# Altium PCB LAN7800_USB_Ethernet_RevA.PcbDoc
Units mil, origin at the board's own origin, x right, y up, seen from the top; angles counter-clockwise.
Board outline 6000 x 4000 mil, 4 copper layers (Top Layer, GND_1, GND_2, Bottom Layer), stack 61.024 mil thick; 47 components, 39 nets, 190 pads, 0 vias.
Unrouted connection lines stored in the file: 129.
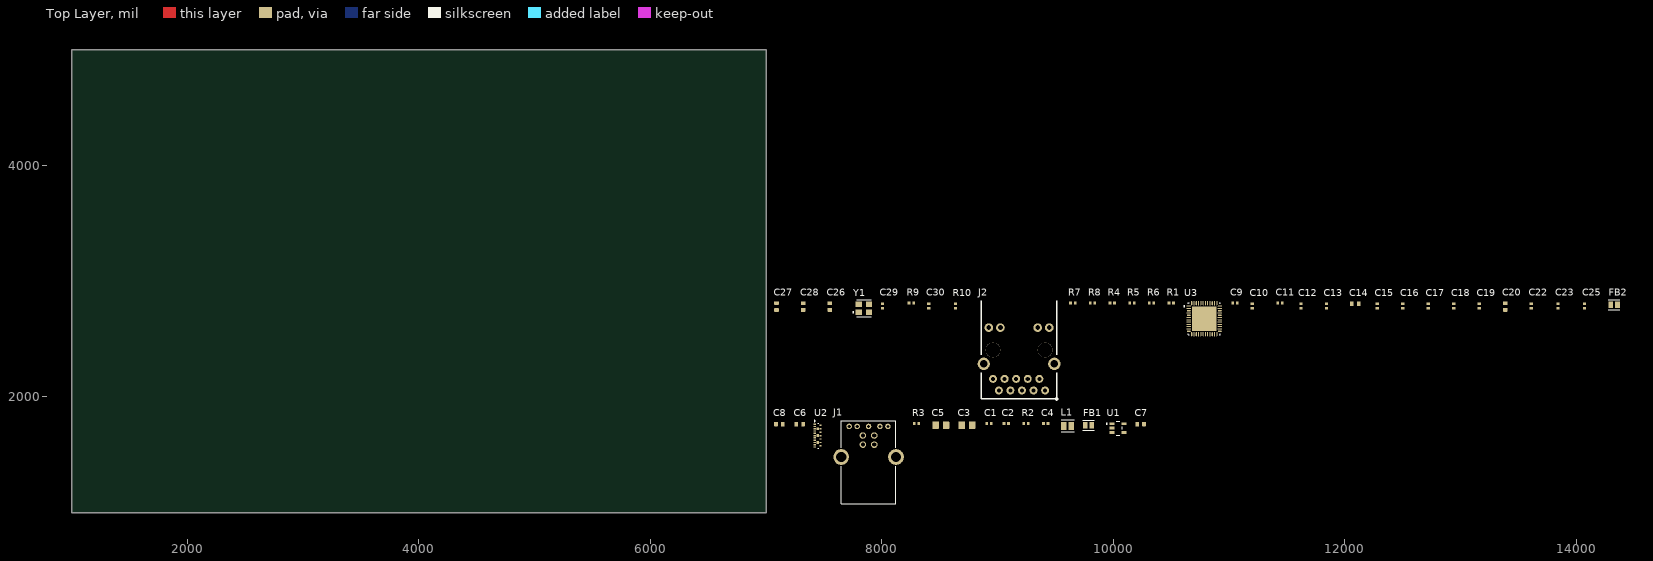
[diagram p0: Top Layer view]
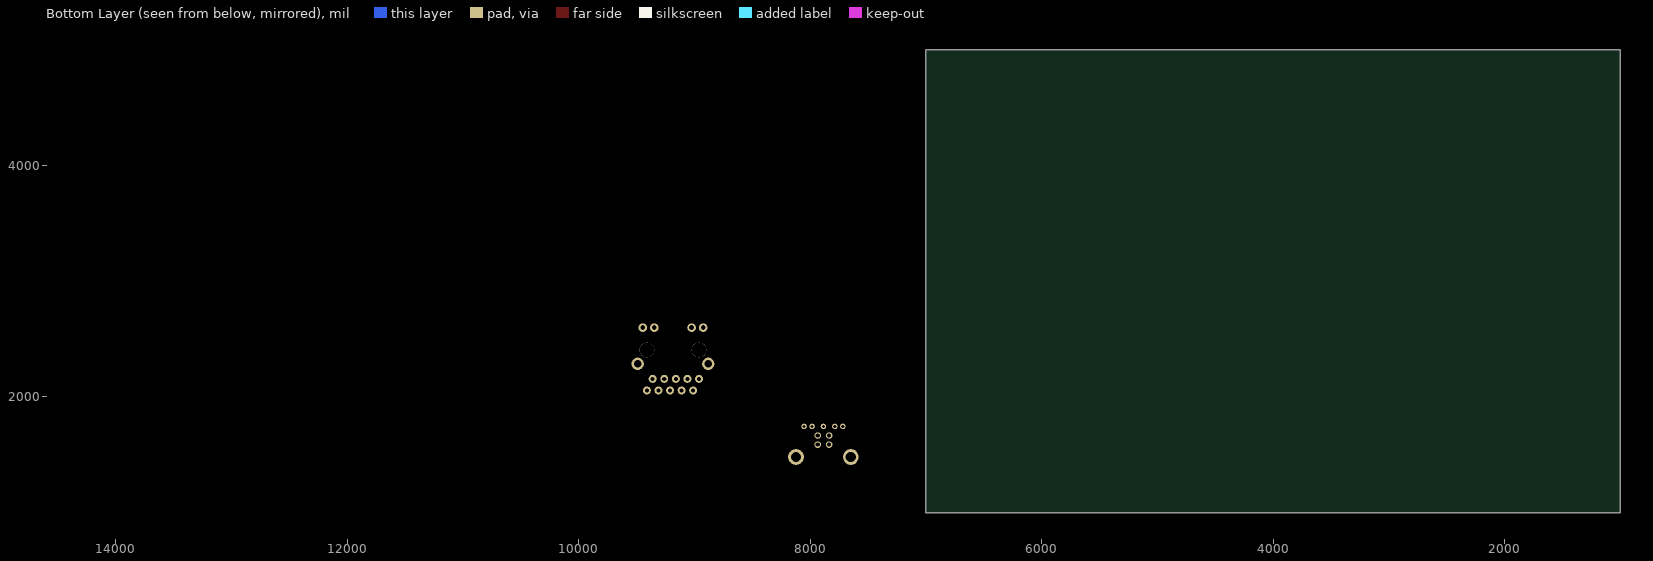
[diagram p1: Bottom Layer view, seen from below]
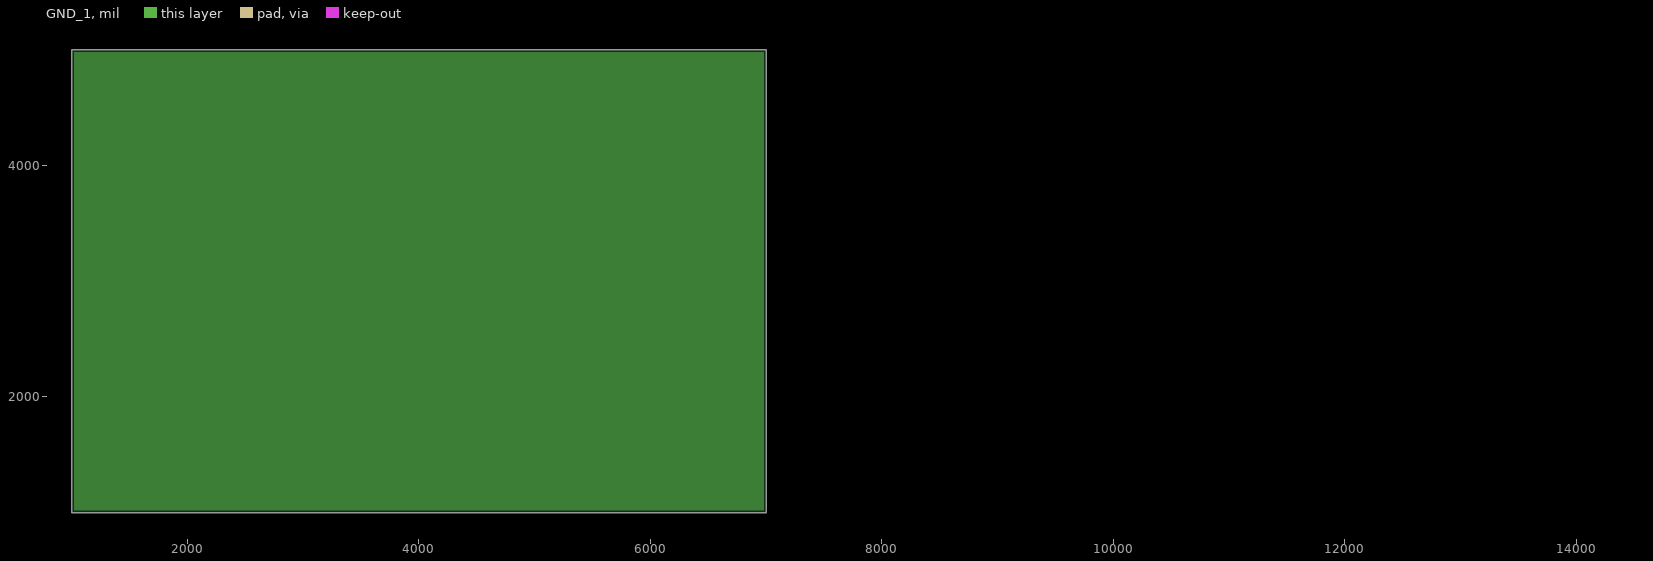
[diagram p2: GND_1, clearances drawn from the general rule]
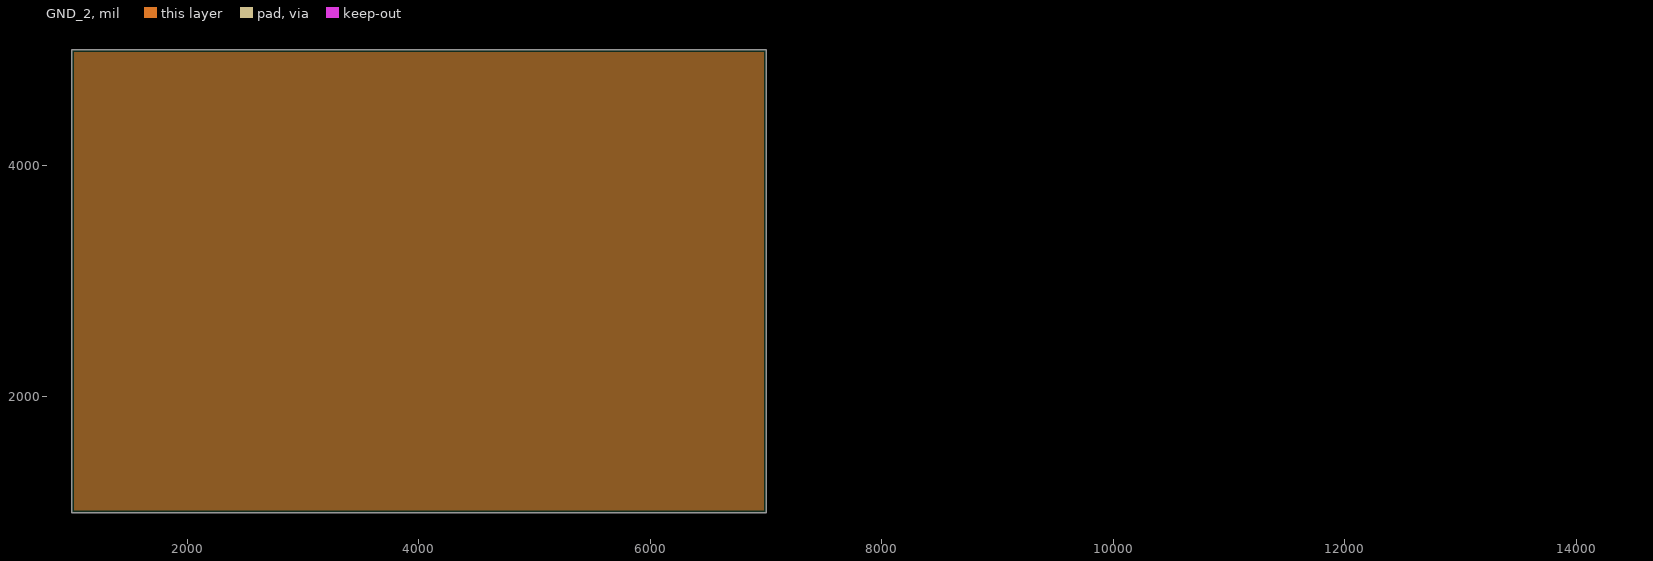
[diagram p3: GND_2, clearances drawn from the general rule]

## Layer stack, top to bottom
Top Solder: solder mask 0.3937, Solder Resist, Dk 3.5
Top Layer: signal copper 1.378
Dielectric 2: prepreg 7.874, IS400, Dk 4.2
GND_1: plane copper 1.378
Dielectric 1: dielectric 39.7638, IS400, Dk 4.4
GND_2: plane copper 1.378
Dielectric 3: prepreg 7.874, IS400, Dk 4.2
Bottom Layer: signal copper 1.378
Bottom Solder: solder mask 0.3937, Solder Resist, Dk 3.5

## Board outline
1000,1000 7000,1000 7000,5000 1000,5000

## Design rules (kind name [scope] priority, off if disabled: settings)
Clearance CLEARANCE_SAME_DIFF_PAIR [All] p1: gap=5 ignorepadtopadclearanceinfootprint=FALSE
Clearance Clearance_1 [All] p2: gap=10 ignorepadtopadclearanceinfootprint=FALSE
DiffPairsRouting DP_USB2_D90 [InDifferentialPairClass('USB2_DIFF')] p1: maxlimit=5 minlimit=5 mostfreqgap=5 toplayer_minwidth=9.69 toplayer_maxwidth=9.69 toplayer_prefwidth=9.69 bottomlayer_minwidth=9.69 bottomlayer_maxwidth=9.69 bottomlayer_prefwidth=9.69 impedanceprofiledriven=TRUE impedanceprofileid={173104B4-F4B9-4A2C-8924-E43239866977} impedanceprofilevalue=90.000000 maxuncoupledlength=500
DiffPairsRouting DP_USB3_D90 [InDifferentialPairClass('USB3_DIFF')] p2: maxlimit=5 minlimit=5 mostfreqgap=5 toplayer_minwidth=9.69 toplayer_maxwidth=9.69 toplayer_prefwidth=9.69 bottomlayer_minwidth=9.69 bottomlayer_maxwidth=9.69 bottomlayer_prefwidth=9.69 impedanceprofiledriven=TRUE impedanceprofileid={173104B4-F4B9-4A2C-8924-E43239866977} impedanceprofilevalue=90.000000 maxuncoupledlength=500
DiffPairsRouting DP_ETH_D100 [InDifferentialPairClass('ETH_DIFF')] p3: maxlimit=5 minlimit=5 mostfreqgap=5 toplayer_minwidth=7.24 toplayer_maxwidth=7.24 toplayer_prefwidth=7.24 bottomlayer_minwidth=7.24 bottomlayer_maxwidth=7.24 bottomlayer_prefwidth=7.24 impedanceprofiledriven=TRUE impedanceprofileid={E3C815A3-BF4B-4A62-B495-158BF076C68E} impedanceprofilevalue=100.000000 maxuncoupledlength=500
DiffPairsRouting [All] p4: maxlimit=10 minlimit=10 mostfreqgap=10 toplayer_minwidth=15 toplayer_maxwidth=15 toplayer_prefwidth=15 bottomlayer_minwidth=15 bottomlayer_maxwidth=15 bottomlayer_prefwidth=15 maxuncoupledlength=500
PlaneClearance [All] p1: clearance=20
PlaneConnect [All] p1: planeconnectstyle=Relief reliefexpansion=20 reliefentries=4 reliefconductorwidth=10 reliefairgap=10
PolygonConnect [All] p1: connectstyle=Relief reliefconductorwidth=10 reliefentries=4 polygonreliefangle="90 Angle" airgapwidth=10
RoutingVias [All] p1: holewidth=28 width=50 viastyle="Through Hole" minholewidth=28 minwidth=50 maxholewidth=28 maxwidth=50
SolderMaskExpansion [All] p1: expansion=4 istentingtop=FALSE
SupplyNets "Schematic Supply Nets_8" [InNet('+3V3')] p1: voltage=0.000
SupplyNets "Schematic Supply Nets_7" [InNet('GNDE')] p2: voltage=0.000
SupplyNets "Schematic Supply Nets_6" [InNet('GNDU')] p3: voltage=0.000
SupplyNets "Schematic Supply Nets_5" [InNet('+1V2')] p4: voltage=0.000
SupplyNets "Schematic Supply Nets_4" [InNet('VBUSF')] p5: voltage=0.000
SupplyNets "Schematic Supply Nets_3" [InNet('GND')] p6: voltage=0.000
SupplyNets "Schematic Supply Nets_2" [InNet('+2V5')] p7: voltage=0.000
SupplyNets "Schematic Supply Nets_1" [InNet('+1V2A')] p8: voltage=0.000
SupplyNets "Schematic Supply Nets" [InNet('VBUS')] p9: voltage=0.000
Width Width_1 [All] p1: maxlimit=10 minlimit=10 preferedwidth=10
Width WIDTH_VBUS [InNetClass('All Nets')] p2: maxlimit=10 minlimit=10 preferedwidth=10
Width WIDTH_GENERAL [All] p3: maxlimit=11.81 minlimit=5.91 preferedwidth=7.87
27 further rules are at their usual default settings.

## Classes and differential pairs
net class POWER_VBUS: VBUS VBUSF
differential pair class ETH_DIFF: D_MDI_TR0 D_MDI_TR1 D_MDI_TR2 D_MDI_TR3
differential pair class USB3_DIFF: D_USB3_RX D_USB3_TX
differential pair class USB2_DIFF: D_USB_D
net class POWER_1V2: +1V2 +1V2A
net class POWER_2V5: +2V5
net class POWER_3V3: VBUS VBUSF
net class CLOCK_25MHZ: XI XO
net class ETH_MDI: MDI_TR0_N MDI_TR0_P MDI_TR1_N MDI_TR1_P MDI_TR2_N MDI_TR2_P MDI_TR3_N MDI_TR3_P
net class USB3_SS: USB3_RX_N USB3_RX_P USB3_TX_N USB3_TX_P
net class USB2_HS: USB_D_N USB_D_P
component class 02_LAN7800_Controller: C9 C10 C11 C12 C13 C14 C15 C16 C17 C18 C19 C20 C22 C23 C25 C26 C27 C28 C29 C30 FB2 J2 L2 R1 R4 R5 R6 R7 R8 R9 R10 U3 Y1
component class 01_USB_B_and_Power: C1 C2 C3 C4 C5 C6 C7 C8 FB1 J1 L1 R2 R3 U1 U2
differential pair D_MDI_TR0: +MDI_TR0_P -MDI_TR0_N
differential pair D_MDI_TR1: +MDI_TR1_P -MDI_TR1_N
differential pair D_MDI_TR2: +MDI_TR2_P -MDI_TR2_N
differential pair D_MDI_TR3: +MDI_TR3_P -MDI_TR3_N
differential pair D_USB3_RX: +USB3_RX_P -USB3_RX_N
differential pair D_USB3_TX: +USB3_TX_P -USB3_TX_N
differential pair D_USB_D: +USB_D_P -USB_D_N
differential pair USB_D: +USB_D_P -USB_D_N
differential pair USB3_TX: +USB3_TX_P -USB3_TX_N
differential pair USB3_RX: +USB3_RX_P -USB3_RX_N
differential pair MDI_TR3: +MDI_TR3_P -MDI_TR3_N
differential pair MDI_TR2: +MDI_TR2_P -MDI_TR2_N
differential pair MDI_TR1: +MDI_TR1_P -MDI_TR1_N
differential pair MDI_TR0: +MDI_TR0_P -MDI_TR0_N

## Components (designator, comment, footprint, x,y, rotation, side; value= is the part's Value field where it differs from the comment)
C1 "1uF" CAP_0402 8925,1770 r0 top
C2 "1uF" CAP_0402 9075,1770 r0 top
C3 "22uF" CAP_0805 8735,1755 r0 top
C4 "12pF" CAP_0402 9415,1770 r0 top
C5 "22uF" CAP_0805 8510,1755 r0 top
C6 "22pF" CAP_0603 7290,1765 r0 top
C7 "C0603" CAP_0603 10235,1765 r0 top
C8 "220pF" CAP_0603 7115,1765 r0 top
C9 "100nF" CAP_0402 11050,2810 r0 top
C10 "100nF" CAP_0402 11200,2785 r90 top
C11 "100nF" CAP_0402 11440,2810 r0 top
C12 "100nF" CAP_0402 11620,2785 r90 top
C13 "100nF" CAP_0402 11840,2785 r90 top
C14 "22uF" CAP_0603 12090,2805 r0 top
C15 "100nF" CAP_0402 12280,2785 r90 top
C16 "100nF" CAP_0402 12500,2785 r90 top
C17 "100nF" CAP_0402 12720,2785 r90 top
C18 "100nF" CAP_0402 12940,2785 r90 top
C19 "100nF" CAP_0402 13160,2785 r90 top
C20 "22uF" CAP_0603 13385,2780 r90 top
C22 "100nF" CAP_0402 13610,2785 r90 top
C23 "100nF" CAP_0402 13840,2785 r90 top
C25 "1uF" CAP_0402 14070,2785 r90 top
C26 "220pF" CAP_0603 7550,2780 r90 top
C27 "15pF" CAP_0603 7090,2780 r90 top
C28 "15pF" CAP_0603 7320,2780 r90 top
C29 "1uF" CAP_0402 8005,2785 r90 top
C30 "1uF" CAP_0402 8405,2785 r90 top
FB1 "BLM21PG221SN1D" FP-BLM21-0_2-t0_85-e0_5-IPC_C 9785,1755 r0 top
FB2 "220R@100MHz" FP-BLM21-0_2-t0_85-e0_5-IPC_C 14325,2795 r0 top
J1 "692221030100" 692221030100 7885,1435 r0 top
J2 "HR911130A" HR911130A 9185,2405 r0 top
L1 "LQM2MPN4R7MG0L" FP-LQM2MPN_G0-IPC_B 9605,1750 r0 top
R1 "12k" RES_0402 10500,2810 r0 top
R2 "53k6" RES_0402 9245,1770 r0 top
R3 "12k" RES_0402 8300,1770 r0 top
R4 "12k" RES_0402 9990,2810 r0 top
R5 "12k" RES_0402 10160,2810 r0 top
R6 "12k" RES_0402 10330,2810 r0 top
R7 "1k" RES_0402 9650,2810 r0 top
R8 "1k" RES_0402 9820,2810 r0 top
R9 "2k" RES_0402 8255,2810 r0 top
R10 "0R" RES_0402 8635,2785 r90 top
U1 "TLV62568DBVR" FP-DBV0005A-MFG 10040,1730 r0 top
U2 "ESD7008MUTAG" ONSC-UDFN-18-517BV_V 7445,1665 r0 top
U3 "LAN7800-I/Y9X" FP-48SQFN-5304-7x7B-IPC_B 10785,2675 r0 top
Y1 "ABM8G-25.000MHZ-B4Y-T" FP-ABM8G-MFG 7845,2765 r0 top

## Footprints (in the part's own frame and the unit in brackets; to place one, negate y for a bottom-side part, rotate by r counter-clockwise, add the part's x,y. Pads: shape width x height; smd on the part's side, far side on the other; paste and mask are expansions set on the pad)
692221030100 [mm] "USB 3.0 Type B Horizontal"
  round 1.42 hole 0.92: 1(1.25,5.86) 2(-1.25,5.86) 3(-1.25,3.86) 4(1.25,3.86)
  round 1.2 hole 0.7: 5(-4.25,7.86) 6(-2.5,7.86) 7(0,7.86) 8(2.5,7.86) 9(4.25,7.86)
  round 3.45 hole 2.3: Shell(-6.02,1.15) Shell(6.02,1.15)
  silkscreen extent -6,-9.15 6,9.15, body extent -7.2,-9.15 7.2,9.15, height 12.95
CAP_0402 [mm]
  rrect25% 0.6x0.7 smd: 1(-0.5,0) 2(0.5,0)
  body extent -0.5,-0.26 0.5,0.26, height 0.37
CAP_0603 [mm]
  rrect25% 0.8x1 smd: 1(-0.75,0) 2(0.75,0)
  body extent -0.8,-0.4 0.8,0.4, height 0.51
CAP_0805 [mm]
  rrect25% 1.4x1.7 smd: 1(-1.143,0) 2(1.143,0)
  body extent -1.15,-0.76 1.15,0.79, height 1.01
FP-48SQFN-5304-7x7B-IPC_B [mm]
  rect 0.91x0.239 smd paste+0 mask+0: 1(-3.401,2.75)
  rrect100% 0.91x0.239 smd paste+0 mask+0: 2(-3.401,2.25) 3(-3.401,1.75) 4(-3.401,1.25) 5(-3.401,0.75) 6(-3.401,0.25) 7(-3.401,-0.25) 8(-3.401,-0.75) 9(-3.401,-1.25) 10(-3.401,-1.75) 11(-3.401,-2.25) 12(-3.401,-2.75) 25(3.401,-2.75) 26(3.401,-2.25) 27(3.401,-1.75) 28(3.401,-1.25) 29(3.401,-0.75) 30(3.401,-0.25) 31(3.401,0.25) 32(3.401,0.75) 33(3.401,1.25) 34(3.401,1.75) 35(3.401,2.25) 36(3.401,2.75)
  rrect100% 0.239x0.91 smd paste+0 mask+0: 13(-2.75,-3.401) 14(-2.25,-3.401) 15(-1.75,-3.401) 16(-1.25,-3.401) 17(-0.75,-3.401) 18(-0.25,-3.401) 19(0.25,-3.401) 20(0.75,-3.401) 21(1.25,-3.401) 22(1.75,-3.401) 23(2.25,-3.401) 24(2.75,-3.401) 37(2.75,3.401) 38(2.25,3.401) 39(1.75,3.401) 40(1.25,3.401) 41(0.75,3.401) 42(0.25,3.401) 43(-0.25,3.401) 44(-0.75,3.401) 45(-1.25,3.401) 46(-1.75,3.401) 47(-2.25,3.401) 48(-2.75,3.401)
  rect 5.4x5.4 smd paste-1000 mask+0: 49(0,0)
  silkscreen extent -4.53,-3.5 3.5,3.5, body extent -4.11,-4.11 4.11,4.11, height 0.25
FP-ABM8G-MFG [mm]
  rect 1.4x1.2 smd paste+0 mask+0: 1(-1.1,-0.85) 2(1.1,-0.85) 3(1.1,0.85) 4(-1.1,0.85)
  silkscreen extent -2.47,-1.83 1.6,1.83, body extent -1.9,-1.55 1.9,1.55, height 0.25
FP-BLM21-0_2-t0_85-e0_5-IPC_C [mil]
  rect 41.53x53.39 smd paste+0 mask+0: 1(-28.57,0) 2(28.57,0)
  silkscreen extent -49,-44 49,44, body extent -53,-32 53,32, height 10
FP-DBV0005A-MFG [mm]
  rrect17% 1.1x0.6 smd paste+0 mask+0: 1(-1.3,0.95) 2(-1.3,0) 3(-1.3,-0.95) 4(1.3,-0.95) 5(1.3,0.95)
  silkscreen extent -2.57,-1.53 0.87,1.53, body extent -1.95,-1.78 1.95,1.78, height 0.25
FP-LQM2MPN_G0-IPC_B [mil]
  rect 47.48x69.22 smd paste+0 mask+0: 1(-32.52,0) 2(32.52,0)
  silkscreen extent -56,-50 56,50, body extent -66,-44 66,44, height 10
HR911130A [mm]
  round 1.75 hole 0.9: 1(5.72,-8.89) 2(4.45,-6.35) 3(3.18,-8.89) 4(1.91,-6.35) 5(0.64,-8.89) 6(-0.63,-6.35) 7(-1.9,-8.89) 8(-3.17,-6.35) 9(-4.44,-8.89) 10(-5.71,-6.35)
  round 1.9 hole 1.05: 11(6.625,4.9) 12(4.085,4.9) 13(-4.085,4.9) 14(-6.625,4.9)
  round 3.25 hole 3.25 unplated: MH(-5.715,0) MH(5.715,0)
  round 2.7 hole 1.65: SH(-7.745,-3.05) SH(7.745,-3.05)
  silkscreen extent -8.25,-10.95 8.45,10.75, body extent -7.94,-10.49 7.94,10.91, height 13.51
ONSC-UDFN-18-517BV_V [mm] "SON, 18-Leads, Body 5.5x1.5mm"
  rect 0.5x0.3 smd: 1(-0.65,2.5) 2(-0.65,2) 3(-0.65,1.5) 4(-0.65,1) 5(-0.65,0.5) 6(-0.65,0) 7(-0.65,-0.5) 8(-0.65,-1) 9(-0.65,-1.5) 10(-0.65,-2) 11(-0.65,-2.5) 12(0.65,-2.25) 13(0.65,-1.5) 14(0.65,-0.75) 15(0.65,0) 16(0.65,0.75) 17(0.65,1.5) 18(0.65,2.25)
  rect 0.5x0.6 smd: 19(0,1.5) 20(0,0) 21(0,-1.5)
  silkscreen extent -0.77,-2.75 0.21,3.32, body extent -0.75,-2.75 0.75,2.75, height 0.55
RES_0402 [mm]
  rrect25% 0.6x0.7 smd: 1(-0.5,0) 2(0.5,0)
  body extent -0.5,-0.25 0.5,0.25, height 0.3

## Part data
C1 C2 C4 C9 C10 C11 C12 C13 C15 C16 C17 C18 C19 C22 C23 C25 C29 C30: library part CAP_0402, "Capacitor SMD 0402"
C3 C5: library part CAP_0805, "Capacitor SMD 0805"
C6 C7 C8 C14 C20 C26 C27 C28: library part CAP_0603, "Capacitor SMD 0603"
FB1 FB2: library part CMP-0686-00610-3, "Chip Ferrite Bead, 0805, 220Ω @ 100MHz, 0.045Ω, 25%, 2A", Case Code (Imperial)=0805, Case Code (Metric)=2012, Current=2A, DC Resistance (DCR)=45mR, Frequency=100MHz, Max Operating Temperature=125°C, Min Operating Temperature=-55°C, Package Quantity=1, Tolerance=25%, Case/Package=0805, Contact Plating=Tin, Core Material=Ferrite, Current Rating=2A, DC Current=2A, DC Resistance-Max=45mR, Depth=1.25mm, Height=0.85mm, Impedance=220R, Lead Free="Lead Free", Length=2mm, Material=Ferrite, Max Current Rating=2A, Max DC Current=2A, Military Standard=Not, Number of Circuits=1, Number of Lines=1, Number of Pins=2, Packaging="Tape and Reel", Radiation Hardening=No, REACH SVHC="No SVHC", RoHS Compliant=Yes, Series=BLM21P, Shielding=Unshielded, Termination=SMD/SMT, Test Frequency=100MHz, Width=1.25mm
J1: library part CMP-1502-03224-3, "Conn USB 3.0 Type B RCP 9 POS (1.75mm/2.5)mm/1.25mm Solder RA Thru-Hole 9 Terminal 1 Port Tray", Color=Blue, Contact Resistance=50mΩ, Current Rating=250mA, Flammability Rating="UL94 V-0", Insulation Resistance=100MΩ, Max Operating Temperature=85°C, Min Operating Temperature=-20°C, Operating Supply Voltage=30V, Connector Type=USB, Contact Material="Nickel, Tin", Contact Plating=Gold, Features=Shielded, Gender=Receptacle, Height=13.05mm, Lead Free="Lead Free", Length=12mm, Mount="Horizontal, PCB, Through Hole", Number Of Contacts=9, Number of Pins=9, Number of Ports=1, Orientation=Horizontal, RoHS=Compliant, Termination="Through Hole", USB Standard="USB 3.0", Voltage Rating=30V, Voltage Rating (AC)=30V, Width=18.3mm
J2: "100/1000Base-T Magnetics Single-Port RJ45 Connector with Integrated Magnetics and LEDs", Manufacturer=Hanrun, Manufacturer Part Number=HR911130A
L1: library part CMP-06042-016483-1, "Multilayer Type Inductor for Power Lines, 0806 (2016), 4.7μH, 20%, 0.175Ω, 1.1A", Case Code (Imperial)=0806, Case Code (Metric)=2016, Case/Package=0805, Current Rating=1.1A, DC Resistance (DCR)=175mR, Inductance=4.7uH, Max Operating Temperature=125°C, Min Operating Temperature=-55°C, Package Quantity=3000, Self Resonant Frequency=20MHz, Test Frequency=1MHz, Tolerance=20%, Core Material=Ferrite, DC Current=1.1A, Depth=1.75mm, Height=0.9mm, Height - Seated (Max)=0.039inch, Length=0.079inch, Max DC Current=1.1A, Military Standard=Not, Mount="Surface Mount", Packaging="Tape and Reel", RoHS Compliant=Yes, Shielding=Shielded, Termination=SMD/SMT, Weight=0.000353oz, Width=0.049inch
R1 R2 R3 R4 R5 R6 R7 R8 R9 R10: library part RES_0402, "Resistor SMD 0402"
U1: library part CMP-04918-000009-1, "IC REG BUCK ADJ 1A SOT23-5", Manufacturer="Texas Instruments", Max Junction Temp=+125°C, Max Supply Voltage=5.5V, Min Supply Voltage=2.5V, Nominal Supply Current=35uA, Output Current=1A, Output Voltage=0.6-5.5V, Package=DBV0005A, Switching Frequency=1.5MHz, Temperature="-40°C to +125°C", Temperature Range Low=-40°C, Automotive=No, Category=IC, ComponentLink2Description=Datasheet, ComponentLink2URL=http://www.ti.com/lit/ds/symlink/tlv62568.pdf, Device Class L1="Integrated Circuits (ICs)", Device Class L2="Power Management ICs", Device Class L3="Voltage Regulators - Switching", Digikey Description="IC REG BUCK ADJ 1A SOT23-5", Height=1.45mm, Lead Free=Yes, Manufacturer Part Number=TLV62568DBVR, Max Duty Cycle=100%, Mouser Description="1-A High Efficiency Synchronous Buck Converter, SMD, 5-pin SOT-23, T/R 3k", Number of Outputs=1, Octopart=https://octopart.com/tlv62568dbvr-texas+instruments-76926199, Output Type=AdjustableProgrammable, RoHS=TRUE, Standoff Height=0mm, Switching Topology=Buck, Temperature Range High=+125°C
U2: library part CMP-1063-00247-1, "Transient Voltage Suppressor, Low Capacitance ESD Protection for High Speed Data, 18-Pin UDFN, Pb-Free, Tape and Reel", Manufacturer="On Semiconductor", ComponentLink1Description="Manufacturer URL", ComponentLink1URL=http://www.onsemi.com/, ComponentLink2Description=Datasheet, ComponentLink2URL=http://www.onsemi.cn/pub_link/Collateral/ESD7008-D.PDF, ComponentLink3Description="Package Specification", ComponentLink3URL=http://www.onsemi.cn/pub_link/Collateral/517BV.PDF, DatasheetVersion="Rev. 4", Direction=Bidirectional, IR Max (uA)=1, Mounting Technology="Surface Mount", Number of Lines=8, PackageDescription="18-Pin Small Outline No-Lead, Body 5.5 x 1.5 mm", PackageReference=UDFN-18-517BV, PackageVersion="Rev. A, 12/2012", Packing="Tape and Reel", PartNumber=ESD7008MUTAG, RoHS=Pb-Free, V(BR) Min (V)=5.5, VRWM Max (V)=5
U3: library part CMP-06298-000014-1, "IC ETHERNET CTLR USB 48SQFN", Max Operating Temperature=85°C, Min Operating Temperature=-40°C, Operating Supply Current=4mA, Packaging=Tray
Y1: library part CMP-27762-000021-2, "Crystal 25MHz ±30ppm (Tol) ±30ppm (Stability) 10pF FUND 60Ω 4-Pin SMD T/R", Case/Package=CSMD, ESR (Equivalent Series Resistance)=60R, Frequency=25MHz, Frequency Stability=30ppm, Load Capacitance=10pF, Max Operating Temperature=70°C, Min Operating Temperature=-20°C, Operating Frequency="25 MHz", Package Quantity=1000, Depth=2.5mm, Frequency Tolerance=30ppm, Height=0.039inch, Lead Free="Lead Free", Length=3.2mm, Mount="Surface Mount", Number of Pins=4, Packaging="Tape and Reel", Series=ABM8G, Series Resistance=60R, Termination=SMD/SMT, Tolerance=30ppm, Width=0.098inch

## Nets (pads, with @x,y where several pads share a name; then routed paths per layer and width w, separated by ;. In a path a pad name is that pad's centre, name@x,y a point inside that pad or via, vN(x,y) a via of type N, cw(c..) or ccw(c..) an arc to the next point about the centre after c; other vN are vias at no path point)
+1V2: C20.2 C22.2 FB2.1 U3.15 U3.21 U3.42
+1V2A: C23.2 C25.2 FB2.2 U3.25 U3.30 U3.44
+2V5: C15.2 C16.2 C17.2 C18.2 C19.2 U3.3 U3.6 U3.9 U3.12 U3.45
+3V3: C4.2 C5.2 C9.2 C10.2 C11.2 C12.2 C13.2 C14.2 L1.2 R1.2 R2.2 R6.1 R7.1 R8.1 R10.2 U3.14 U3.20 U3.36 U3.39 U3.46
FB: C4.1 R2.1 R3.2 U1.5
GND: C1.1 C2.1 C3.1 C5.1 C8.2 C9.1 C10.1 C11.1 C12.1 C13.1 C14.1 C15.1 C16.1 C17.1 C18.1 C19.1 C20.1 C22.1 C23.1 C25.1 C26.1 C27.1 C28.1 C29.1 C30.1 J1.4 J1.7 J2.10 R3.1 R4.1 R5.1 R9.1 U1.2 U2.3 U2.6 U2.9 U2.13 U2.15 U2.17 U3.49 Y1.2 Y1.4
GNDE: C26.2 J2.SH
GNDU: C8.1 J1.Shell
LED2: J2.12 U3.24
LED3: J2.13 U3.43
MDI_TR0_N: J2.3 U3.2
MDI_TR0_P: J2.2 U3.1
MDI_TR1_N: J2.7 U3.5
MDI_TR1_P: J2.4 U3.4
MDI_TR2_N: J2.6 U3.8
MDI_TR2_P: J2.5 U3.7
MDI_TR3_N: J2.9 U3.11
MDI_TR3_P: J2.8 U3.10
NetC30_2: C30.2 J2.1 R10.1
NetJ2_11: J2.11 R7.2
NetJ2_14: J2.14 R8.2
REF_FILT: C29.2 U3.48
REF_REXT: R9.2 U3.47
RESET: R1.1 U3.35
SW: L1.1 U1.3
TEST: R4.2 U3.34
USB3_RX_N: J1.8 U2.7 U3.28 U3.32
USB3_RX_P: J1.9 U2.8 U3.29 U3.31
USB3_TX_N: J1.5 U2.4
USB3_TX_P: J1.6 U2.5
USB_D_N: J1.2 U2.1 U3.27
USB_D_P: J1.3 U2.2 U3.26
USBRBIAS: R5.2 U3.37
VBUS: C1.2 FB1.1 J1.1
VBUSDET: R6.2 U3.23
VBUSF: C2.2 C3.2 FB1.2 U1.1 U1.4
VDD12_SW_OUT: U3.13
XI: C27.2 U3.40 Y1.1
XO: C28.2 U3.41 Y1.3
pads on no net: C6.1 C6.2 C7.1 C7.2 J2.MH U2.10 U2.11 U2.12 U2.14 U2.16 U2.18 U2.19 U2.20 U2.21 U3.16 U3.17 U3.18 U3.19 U3.22 U3.33 U3.38

## Polygon pours and split planes (outlines as drawn)
no net on GND_1 (split plane): 6979.9,1020.1 1020.1,1020.1 1020.1,4979.9 6979.9,4979.9
no net on GND_2 (split plane): 6979.9,1020.1 1020.1,1020.1 1020.1,4979.9 6979.9,4979.9

## Text inside footprints (layer, text, board x,y; h text height)
J2: Top 3D Body "1" at 9473.72,2030.99 h39.37